# EAGLE board Delay.Chorus PT2399 PANEL (EAGLE 7.7.0)
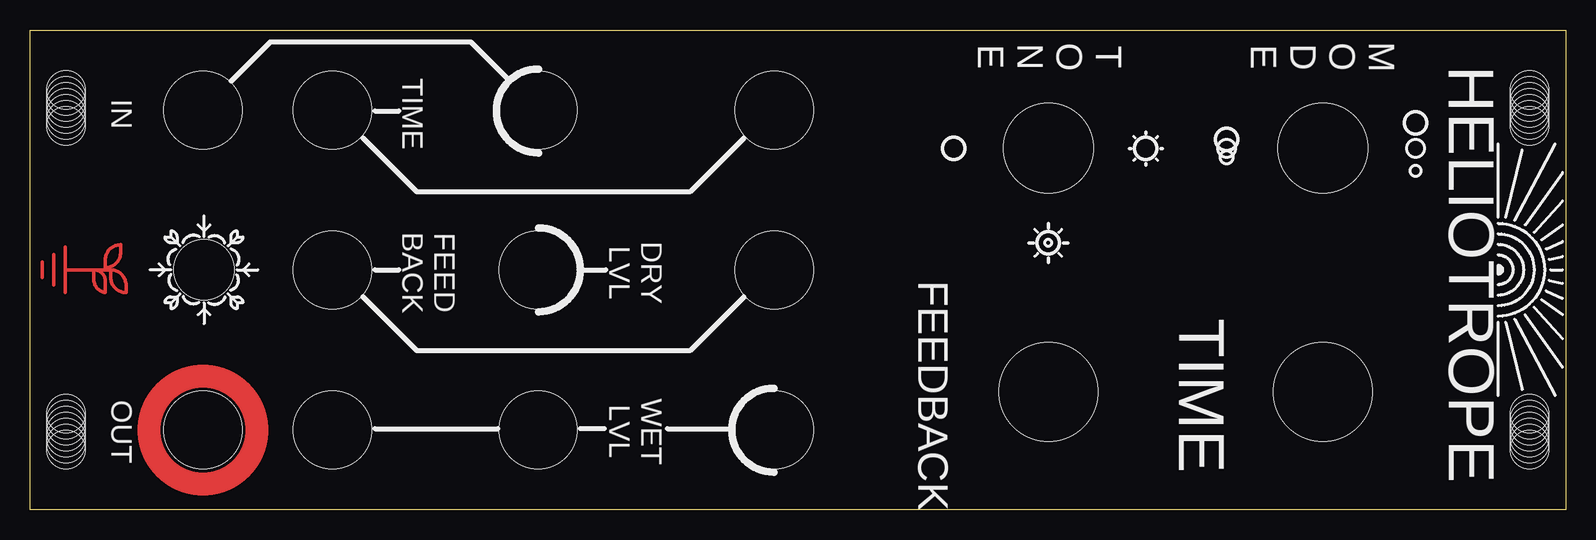
[diagram p0: board, top side]
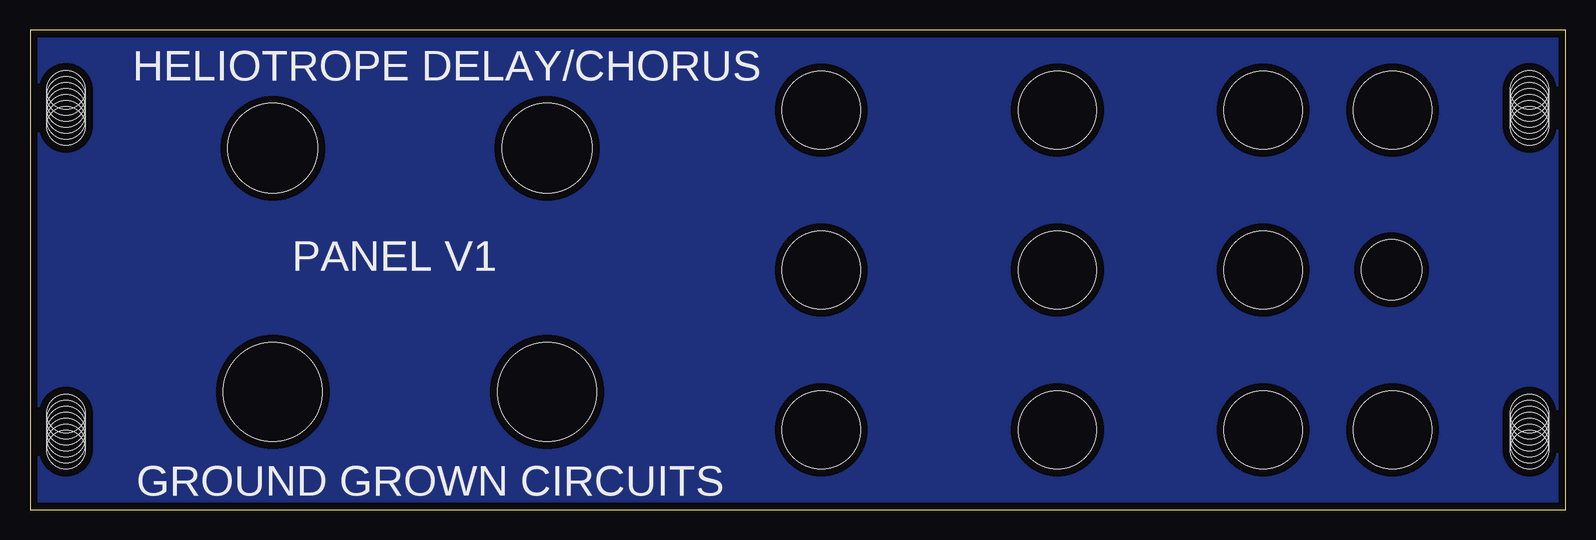
[diagram p1: board, bottom side, seen from below]

Size 128 x 40 mm. Coordinates in mm from the lower left corner, seen from the top.
Outline: 0,0 0,40 128,40 128,0 0,0
Copper layers (1*16): Top 0.035mm / dielectric 1.5mm / Bottom 0.035mm
Design rules "SparkFun": minimum track width 8mil, minimum drill 20mil, track to track 8mil, track to pad 8mil, pad to pad 8mil, via to via 8mil, smd to smd 8mil, copper to edge 8mil, drill to drill 8mil, minimum pad ring 12mil, minimum via ring 10mil, stop-mask expansion 4mil, vias tented up to drill 20mil, thermal gap 10mil
Holes 5 mm at 14.5,20

## Footprints (pad centres in the part's own frame; a part is rotated, then mirrored left to right if it is on the bottom)
JACK_DRILL = hole 6.5: 0,0
MOUNT_DRILL = hole 3.2: 3,8; 3,7.5; 3,7; 3,6.5; 3,6; 3,5.5; 3,5
POT_DRILL = hole 8.25: 0,0
JACK_DRILL_COPPER = hole 6.5: 0,0
SWITCH_DRILL = hole 7.5: 0,0

## Placement (x,y rotation side)
DRY_LVL  B100K  [JACK_DRILL]  42.35,19.98 180 top
E$1  [MOUNT_DRILL]  0,0 0 top
E$2  [MOUNT_DRILL]  128,40 180 top
E$3  [MOUNT_DRILL]  0,40 180 bottom
E$4  [MOUNT_DRILL]  128,0 0 bottom
E$5  [LOGO_SMALL_COPPER]  3,20 270 top
FB  B100K  [POT_DRILL]  84.9,9.82 180 top
FB_AMT  B100K  [JACK_DRILL]  62.04,19.98 180 top
FB_CV  [JACK_DRILL]  25.21,19.98 270 top
IN  [JACK_DRILL]  14.41,33.31 0 top
IN_LVL  B100K  [JACK_DRILL]  42.35,33.31 180 top
OUT  [JACK_DRILL_COPPER]  14.41,6.64 180 top
S1  [SWITCH_DRILL]  84.9,30.14 90 top
S2  [SWITCH_DRILL]  107.76,30.14 270 top
TIME  B100K  [POT_DRILL]  107.76,9.82 180 top
TIME_AMT  B100K  [JACK_DRILL]  62.04,33.31 180 top
TIME_CV  [JACK_DRILL]  25.21,33.31 0 top
WET_AMT  B100K  [JACK_DRILL]  42.35,6.64 180 top
WET_CV  [JACK_DRILL]  25.21,6.64 180 top
WET_LVL  B100K  [JACK_DRILL]  62.04,6.64 180 top

## Library data of the parts
DRY_LVL FB FB_AMT IN_LVL TIME TIME_AMT WET_AMT WET_LVL = GroundGrownCircuits; PROD_ID: RES-09177
E$1-E$5 FB_CV IN OUT S1 S2 TIME_CV WET_CV = GroundGrownCircuits

## Tracks (layer width: path | path; a pad name or v marks a point on that pad's centre or on a via)
S$1
  pour Bottom (isolate 0.61): 0,0 0,40 128,40 128,0

## Text on the board
tPlace: T / O / N / E | M / O / D / E | IN | TIME | FEED / BACK | DRY / LVL | HELIOTROPE | FEEDBACK | TIME | OUT | WET / LVL
bPlace: HELIOTROPE DELAY/CHORUS | PANEL V1 | GROUND GROWN CIRCUITS